# EAGLE board devboards-panel (EAGLE 9.2.2)
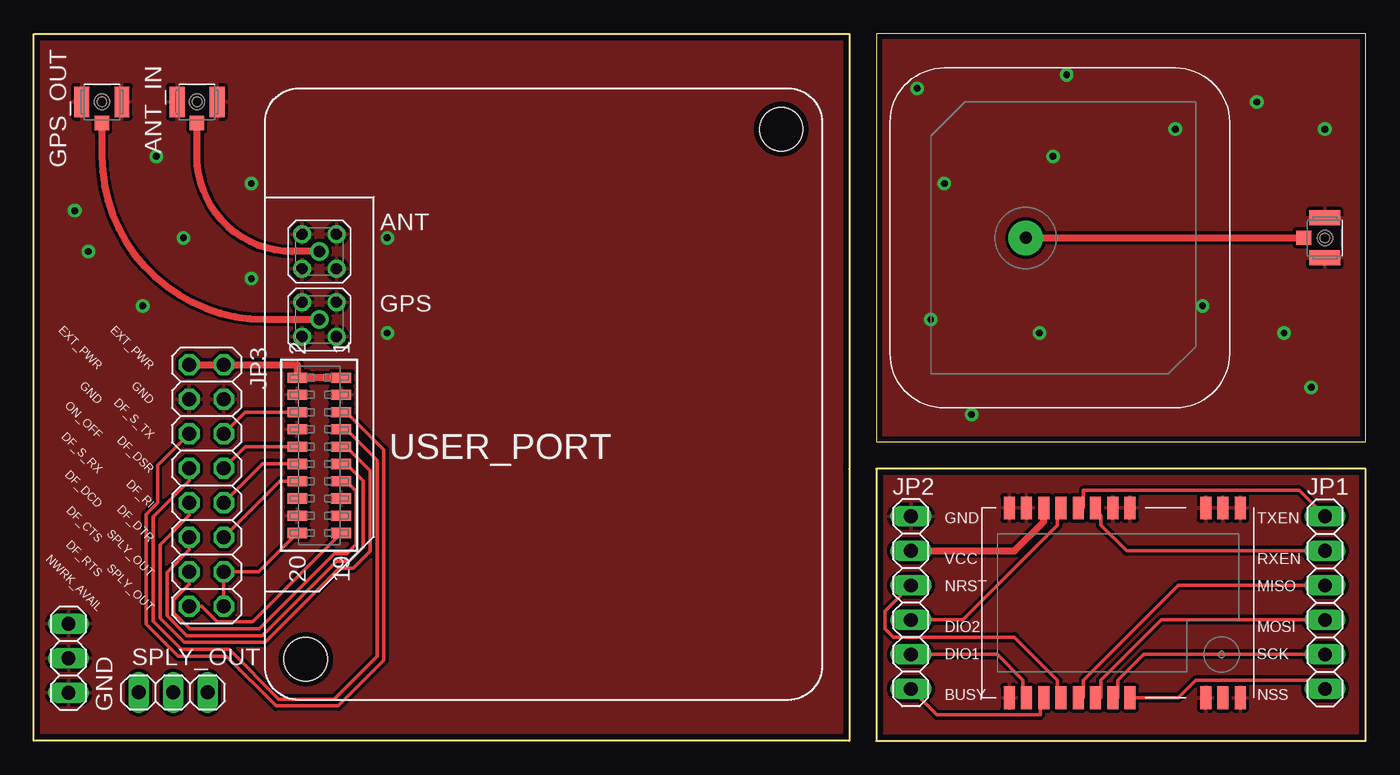
[diagram p0: board, top side]
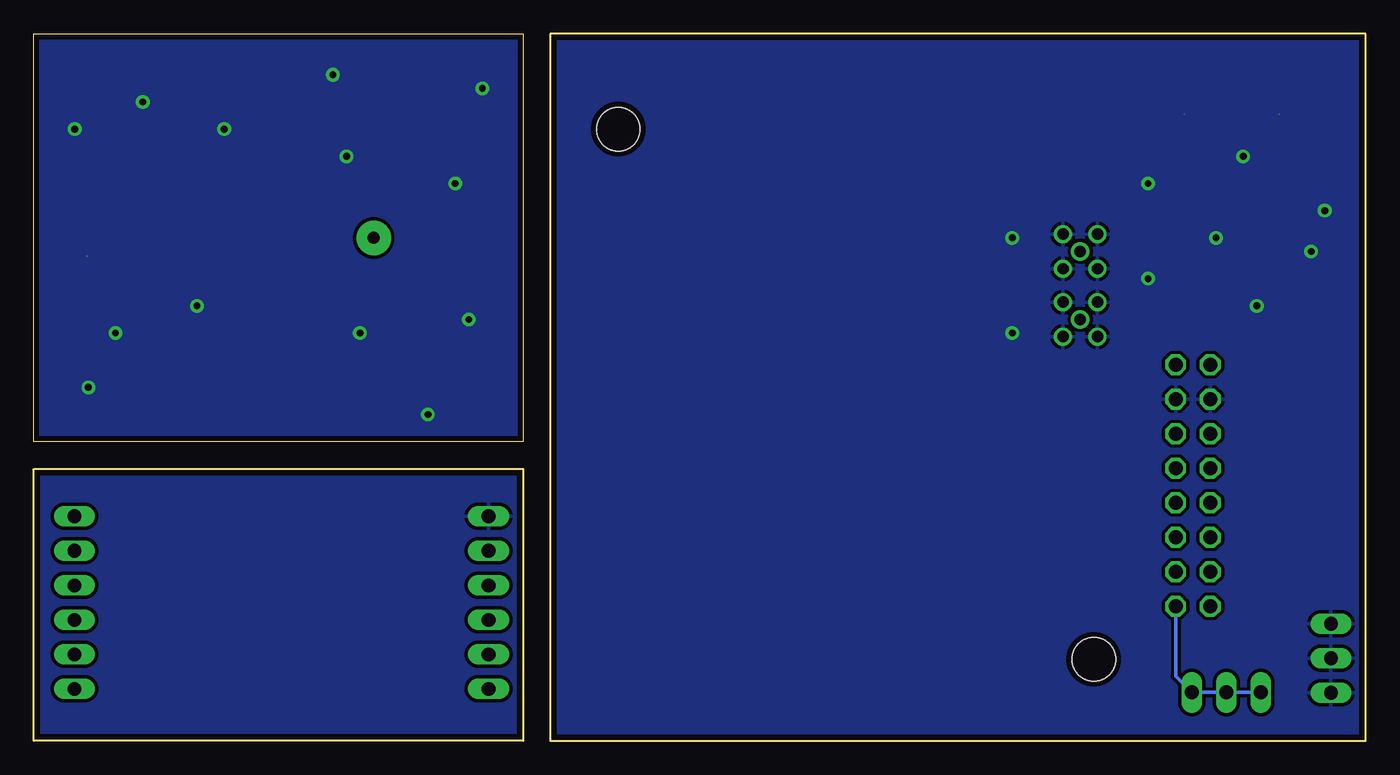
[diagram p1: board, bottom side, seen from below]

Size 98 x 52 mm. Coordinates in mm from the lower left corner, seen from the top.
Outline: 60,0 60,52 0,52 0,0 60,0
Outline: 60,20 60,0
Outline: 62,20 62,0 98,0 98,20 62,20
Outline: 62,22 98,22 98,52 62,52 62,22
Copper layers (1*16): Top 0.035mm / dielectric 1mm / Bottom 0.035mm
Design rules "rezonit": minimum track width 0.2mm, minimum drill 0.5mm, track to track 0.25mm, track to pad 0.25mm, pad to pad 0.25mm, via to via 0.25mm, smd to smd 0.2mm, copper to edge 0.4mm, drill to drill 0.4mm, minimum pad ring 0.25mm, minimum via ring 0.25mm, stop-mask expansion 4mil, vias tented up to drill 0mil, thermal gap 10mil
Net classes: 0 default: width 0.2 mm, clearance 0.2 mm; 1 POWER: width 0.5 mm, clearance 0.2 mm; 2 RF: width 0.5 mm, clearance 0.065 mm
Holes 3.2 mm at 20,6 55,45

## Footprints (pad centres in the part's own frame; a part is rotated, then mirrored left to right if it is on the bottom)
MMCX-P-P-X-ST-TH1 = drill 0.84 pad 1.3: 1 0,0; 2 -1.27,1.27; 3 -1.27,-1.27; 4 1.27,1.27; 5 1.27,-1.27
HRS_U.FL-R-SMT(01) = smd 1.1 x 2.25: 1 -1.475,0; 2 1.475,0 | smd 1.05 x 1.1: 3 0,-1.55
1X03 = drill 1.016 long: 1 -2.54,0; 2 0,0; 3 2.54,0
1X06 = drill 1.016 long: 1 -6.35,0; 2 -3.81,0; 3 -1.27,0; 4 1.27,0; 5 3.81,0; 6 6.35,0
2X08 = drill 1.016 octagon: 1 -8.89,-1.27; 2 -8.89,1.27; 3 -6.35,-1.27; 4 -6.35,1.27; 5 -3.81,-1.27; 6 -3.81,1.27; 7 -1.27,-1.27; 8 -1.27,1.27; 9 1.27,-1.27; 10 1.27,1.27; 11 3.81,-1.27; 12 3.81,1.27; 13 6.35,-1.27; 14 6.35,1.27; 15 8.89,-1.27; 16 8.89,1.27
E22-400M22S = smd 0.813 x 1.676: P$1 -9,-6.97; P$2 -7.73,-6.97; P$3 -6.46,-6.97; P$4 -0.89,-6.97; P$5 0.38,-6.97; P$6 1.65,-6.97; P$7 2.92,-6.97; P$8 4.19,-6.97; P$9 5.46,-6.97; P$10 6.73,-6.97; P$11 8,-6.97; P$12 8,7; P$13 6.73,7; P$14 5.46,7; P$15 4.19,7; P$16 2.92,7; P$17 1.65,7; P$18 0.38,7; P$19 -0.89,7; P$20 -6.46,7; P$21 -7.73,7; P$22 -9,7
BY-IRIDIUM-254 = drill 0.9 pad 2.54: P$1 0,0
SAMTEC-CLP-110-02-X-D = smd 0.74 x 1.47: 1 -5.715,1.613; 2 -5.715,-1.613; 3 -4.445,1.613; 4 -4.445,-1.613; 5 -3.175,1.613; 6 -3.175,-1.613; 7 -1.905,1.613; 8 -1.905,-1.613; 9 -0.635,1.613; 10 -0.635,-1.613; 11 0.635,1.613; 12 0.635,-1.613; 13 1.905,1.613; 14 1.905,-1.613; 15 3.175,1.613; 16 3.175,-1.613; 17 4.445,1.613; 18 4.445,-1.613; 19 5.715,1.613; 20 5.715,-1.613

## Placement (x,y rotation side)
ANT  MMCX-P-P-X-ST-TH1  [MMCX-P-P-X-ST-TH1]  21,36 0 top
ANT_IN  U.FL-R-SMT(01)  [HRS_U.FL-R-SMT(01)]  12,47 0 top
GND  [1X03]  2.54,6.08 90 top
GPS  MMCX-P-P-X-ST-TH1  [MMCX-P-P-X-ST-TH1]  21,31 0 top
GPS_OUT  U.FL-R-SMT(01)  [HRS_U.FL-R-SMT(01)]  5,47 0 top
J1  U.FL-R-SMT(01)  [HRS_U.FL-R-SMT(01)]  95,37 270 top
JP1  [1X06]  95.02,10.16 90 top
JP2  [1X06]  64.54,10.16 270 top
JP3  [2X08]  12.7,18.78 270 top
SPLY_OUT  [1X03]  10.24,3.56 180 top
U$1  E22-400M22S  [E22-400M22S]  79.78,10.16 180 top
U$2  BY-IRIDIUM-254  [BY-IRIDIUM-254]  73,37 90 top
USER_PORT  SAMTEC-CLP-110-02-X-DJ  [SAMTEC-CLP-110-02-X-D]  21,21 270 top

## Library data of the parts
ANT GPS = MMCX-P-P-X-ST-TH1; DESCRIPTION: Conn MMCX PL 0Hz to 6GHz 50Ohm Solder ST Thru-Hole Gold Over Nickel; DIGI-KEY_PART_NUMBER: SAM10618-ND; DIGI-KEY_PURCHASE_URL: https://www.digikey.ru/product-detail/en/samtec-inc/MMCX-P-P-H-ST-TH1/SAM10618-ND/6561612?utm_source=snapeda&utm_medium=aggregator&utm_campaign=symbol; MF: Samtec Inc.; MP: MMCX-P-P-H-ST-TH1; PACKAGE: None
ANT_IN GPS_OUT J1 = U.FL-R-SMT_01_; DESCRIPTION: U.FL Series 6 Ghz 50 Ohm Ultra-small SMT Coaxial Cable Receptacle; DIGI-KEY_PART_NUMBER: H9161-ND; DIGI-KEY_PURCHASE_URL: https://www.digikey.ru/product-detail/en/hirose-electric-co-ltd/U.FL-R-SMT_01_/H9161-ND/513010?utm_source=snapeda&utm_medium=aggregator&utm_campaign=symbol; MF: Hirose; MP: U.FL-R-SMT_01_; PACKAGE: None
GND JP1-JP3 SPLY_OUT = pinhead
U$1 = ebyte-radio
U$2 = iridium-antenna
USER_PORT = SAMTEC-CLP-110-02-X-D; DESCRIPTION: .050 Tiger Claw™ Rugged Reliable Dual Wipe Socket Strip; DIGI-KEY_PART_NUMBER: CLP-110-02-L-D-K-ND; DIGI-KEY_PURCHASE_URL: https://www.digikey.ru/product-detail/en/samtec-inc/CLP-110-02-L-D-K/CLP-110-02-L-D-K-ND/6693709?utm_source=snapeda&utm_medium=aggregator&utm_campaign=symbol; MF: Samtec Inc.; MP: CLP-110-02-L-D-K; PACKAGE: None

## Nets
BUSY: JP2.6 U$1.P$14
DF_CTS: JP3.11 USER_PORT.11
DF_DCD: JP3.9 USER_PORT.9
DF_DSR: JP3.8 USER_PORT.10
DF_DTR: JP3.12 USER_PORT.14
DF_RI: JP3.10 USER_PORT.12
DF_RTS: JP3.13 USER_PORT.13
DF_S_RX: JP3.7 USER_PORT.7
DF_S_TX: JP3.6 USER_PORT.6
DIO1: JP2.5 U$1.P$13
DIO2: JP2.4 U$1.P$8
GND [POWER]: ANT.2 ANT.3 ANT.4 ANT.5 ANT_IN.1 ANT_IN.2 GND.1 GND.2 GND.3 GPS.2 GPS.3 GPS.4 GPS.5 GPS_OUT.1 GPS_OUT.2 JP3.3 JP3.4 USER_PORT.3 USER_PORT.4 USER_PORT.8 USER_PORT.15 USER_PORT.18
GND1 [POWER]: JP2.1 U$1.P$1 U$1.P$2 U$1.P$3 U$1.P$4 U$1.P$5 U$1.P$10 U$1.P$11 U$1.P$12 U$1.P$20 U$1.P$22
GND2: J1.1 J1.2
MISO: JP1.4 U$1.P$16
MOSI: JP1.3 U$1.P$17
N$1 [RF]: J1.3 U$2.P$1
N$21 [RF]: ANT.1 ANT_IN.3
N$22 [RF]: GPS.1 GPS_OUT.3
NETWORK_AVAILABLE: JP3.15 USER_PORT.19
NRST: JP2.3 U$1.P$15
NSS: JP1.1 U$1.P$19
ON_OFF: JP3.5 USER_PORT.5
RESERVED_1: USER_PORT.16
RESERVED_2\: USER_PORT.17
RXEN: JP1.5 U$1.P$6
SCK: JP1.2 U$1.P$18
SUPPLY_OUT: JP3.14 JP3.16 SPLY_OUT.1 SPLY_OUT.2 SPLY_OUT.3 USER_PORT.20
TXEN: JP1.6 U$1.P$7
VCC [POWER]: JP2.2 U$1.P$9
VCC5 [POWER]: JP3.1 JP3.2 USER_PORT.1 USER_PORT.2

## Tracks (layer width: path | path; a pad name or v marks a point on that pad's centre or on a via)
BUSY
  Top 0.254: JP2.6 66.44,1.91 74.06,1.91 74.06,2.54 U$1.P$14
DF_CTS
  Top 0.254: USER_PORT.11 22.64,20.34 23,20.34 24.23,19.12 24.23,14.25 23.19,13.21 22.26,13.21 16.79,7.74 11.25,7.74 9.79,9.21 9.79,12.4 11.43,14.04 JP3.11
DF_DCD
  Top 0.254: USER_PORT.9 22.66,21.64 22.74,21.71 22.9,21.71 24.73,19.88 24.73,13.94 23.5,12.7 22.47,12.7 17,7.24 11.04,7.24 9.28,9 9.28,14.43 11.43,16.58 JP3.9
DF_DSR
  Top 0.254: USER_PORT.10 15.55,21.64 JP3.8
DF_DTR
  Top 0.254: USER_PORT.14 18.09,19.09 JP3.12
DF_RI
  Top 0.254: USER_PORT.12 16.82,20.36 JP3.10
DF_RTS
  Top 0.254: USER_PORT.13 22.64,19.07 23,19.07 23.73,18.35 23.73,14.46 23.03,13.77 22.1,13.77 16.58,8.25 11.46,8.25 10.29,9.42 10.29,10.36 11.43,11.5 JP3.13
DF_S_RX
  Top 0.254: USER_PORT.7 22.64,22.88 23,22.88 25.24,20.65 25.24,6.23 22.08,3.07 18.02,3.07 14.36,6.74 10.84,6.74 8.78,8.79 8.78,16.47 11.43,19.12 JP3.7
DF_S_TX
  Top 0.254: USER_PORT.6 15.55,24.18 JP3.6
DIO1
  Top 0.254: JP2.5 70.89,6.35 72.8,4.45 72.8,3.17 U$1.P$13
DIO2
  Top 0.254: JP2.4 68.35,8.89 75.33,15.88 75.33,16.51 U$1.P$8
GND  (via drill 0.5)
  other vias: 3,39 4,36 9,43 11,37 16,41 16,34 26,30 26,37 8,32
  pour Bottom: 60,0 60,52 0,52 0,0
  pour Top: 0,0 60,0 60,52 0,52
GND1
  pour Top: 62,20 62,0 98,0 98,20
  pour Bottom: 62,20 62,0 98,0 98,20
GND2  (via drill 0.5)
  other vias: 90,47 75,43 84,45 74,30 86,32 66,31 67,41 65,48 76,49 92,30 94,26 95,45 69,24
  pour Top: 62,52 98,52 98,22 62,22
  pour Bottom: 62,52 98,52 98,22 62,22
MISO
  Top 0.254: JP1.4 84.22,11.43 77.24,4.45 77.24,3.17 U$1.P$16
MOSI
  Top 0.254: JP1.3 82.95,8.89 78.51,4.45 78.51,3.17 U$1.P$17
N$1
  Top 0.5: U$2.P$1 J1.3
N$21
  Top 0.5: ANT.1 19,36 arc-90 12,43 ANT_IN.3
N$22
  Top 0.5: GPS_OUT.3 5,43 arc90 17,31 GPS.1
NETWORK_AVAILABLE
  Top 0.254: JP3.15 12.36,9.89 13.5,8.75 16.08,8.75 USER_PORT.19
NRST
  Top 0.254: JP2.3 62.63,9.53 62.63,8.26 63.27,7.62 72.16,7.62 75.33,4.45 75.33,3.17 U$1.P$15
NSS
  Top 0.254: JP1.1 94.39,4.45 85.5,4.45 84.22,3.17 81.05,3.17 U$1.P$19
ON_OFF
  Top 0.254: USER_PORT.5 22.69,24.25 22.9,24.25 25.74,21.41 25.74,5.92 22.39,2.57 17.81,2.57 14.15,6.23 10.63,6.23 8.28,8.58 8.28,16.68 9.1,17.5 9.1,20.26 JP3.5
RXEN
  Top 0.254: JP1.5 80.42,13.97 78.51,15.88 78.51,16.51 U$1.P$6
SCK
  Top 0.254: JP1.2 81.69,6.35 79.78,4.45 79.78,3.17 U$1.P$18
SUPPLY_OUT
  Top 0.254: USER_PORT.20 16.53,12.43 14,12.43 | 14,12.43 JP3.14 | JP3.16 13.97,12.4 14,12.43
  Bottom 0.254: JP3.16 13.97,4.75 SPLY_OUT.1 SPLY_OUT.2 SPLY_OUT.3
TXEN
  Top 0.254: JP1.6 93.11,18.41 77.24,18.41 77.24,17.14 U$1.P$7
VCC
  Top 0.5: JP2.2 72.16,13.97 74.32,16.13 U$1.P$9
VCC5
  Top 0.5: USER_PORT.1 USER_PORT.2 19.39,27.67 JP3.2 JP3.1

## Text on the board
tPlace: GND | TXEN | VCC | RXEN | NRST | MISO | DIO2 | MOSI | DIO1 | SCK | BUSY | NSS
tNames: EXT_PWR | EXT_PWR | GND | GND | ON_OFF | DF_S_TX | DF_S_RX | DF_DSR | DF_DCD | DF_RI | DF_CTS | DF_DTR | DF_RTS | SPLY_OUT | NWRK_AVAIL | SPLY_OUT